# EAGLE board rapidshark_mark_6 (EAGLE 6.5.0)
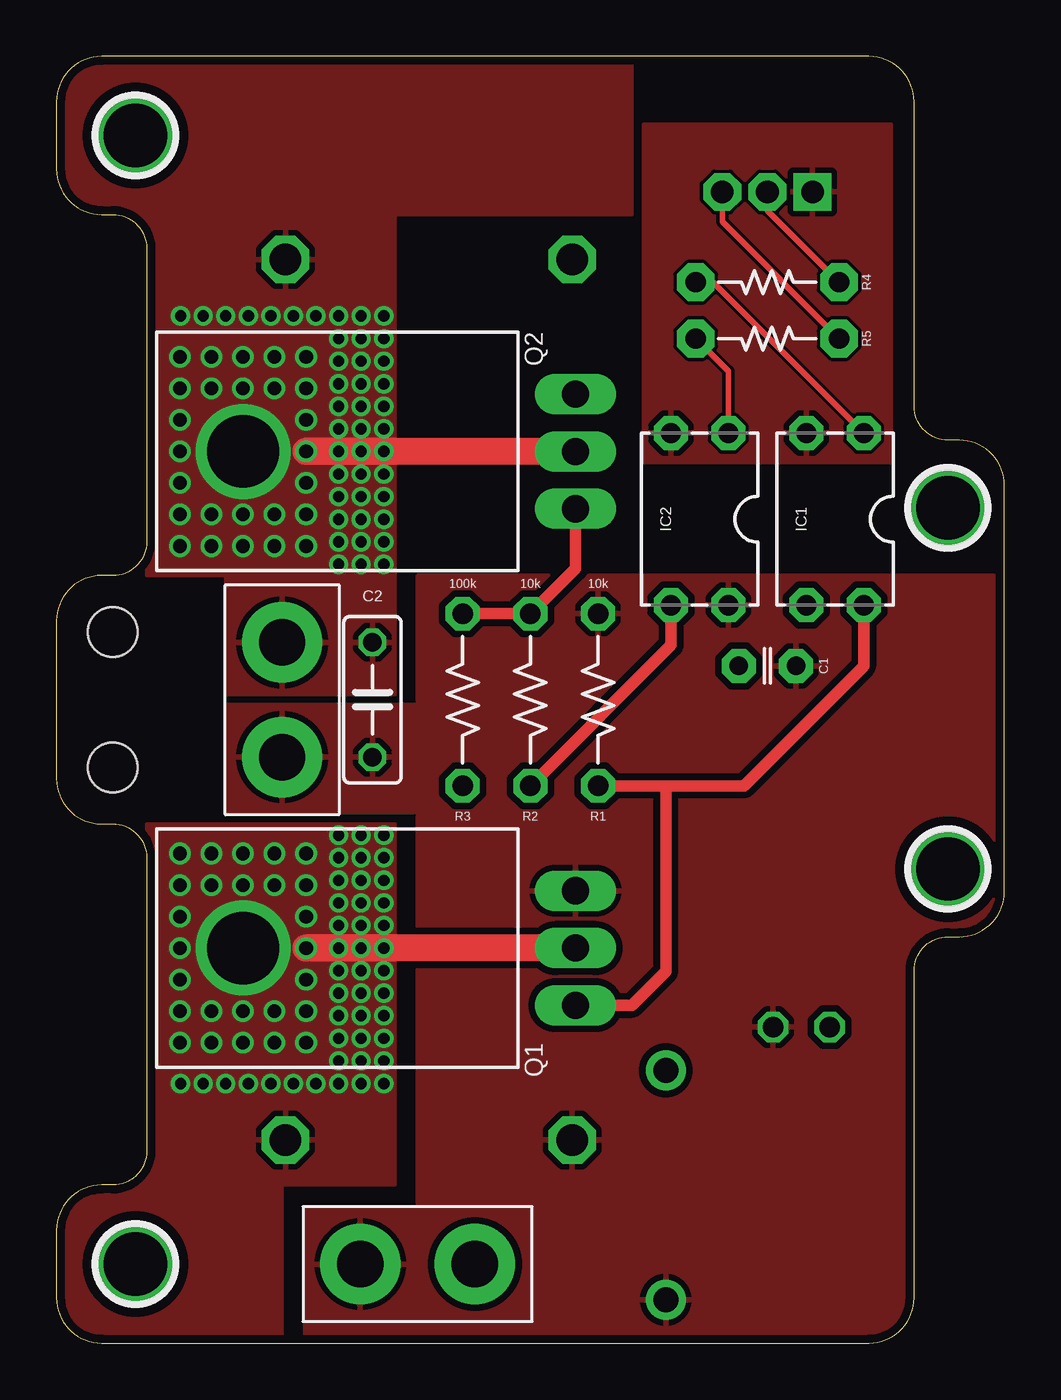
[diagram p0: board, top side]
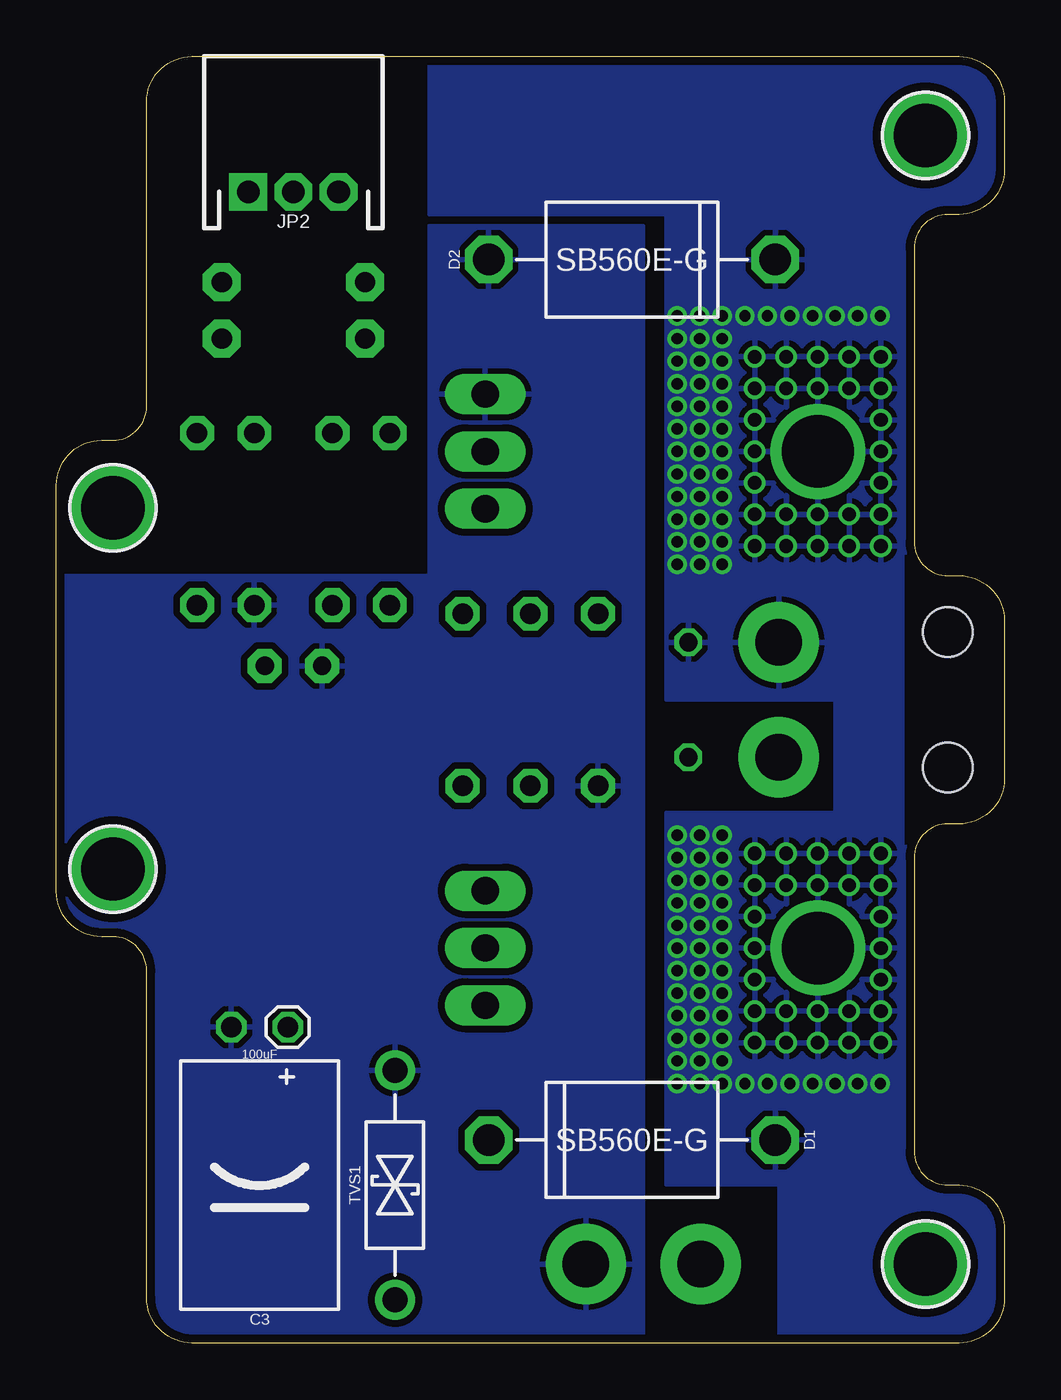
[diagram p1: board, bottom side, seen from below]

Size 42 x 57 mm. Coordinates in mm from the lower left corner, seen from the top.
Outline: 0,5 0,2 arc90 2,0 36,0 arc90 38,2 38,16.5 arc-90 39.5,18 40,18 arc90 42,20 42,38 arc90 40,40 39.5,40 arc-90 38,41.5 38,55 arc90 36,57 2,57 arc90 0,55 0,52 arc90 2,50 2.5,50 arc-90 4,48.5 4,35.5 arc-90 2.5,34 2,34 arc90 0,32 0,25 arc90 2,23 2.5,23 arc-90 4,21.5 4,8.5 arc-90 2.5,7 2,7 arc90 0,5
Copper layers (1*16): Top 0.0356mm / dielectric 1.5011mm / Bottom 0.0356mm
Design rules "LaenPCBOrder_2": minimum track width 6mil, minimum drill 13mil, track to track 6mil, track to pad 6mil, pad to pad 6mil, via to via 6mil, smd to smd 6mil, copper to edge 15mil, drill to drill 6mil, minimum pad ring 7mil, minimum via ring 7mil, stop-mask expansion 3mil, vias tented up to drill 20mil, thermal gap 10mil
Holes 2.2 mm at 2.5,31.5 2.5,25.5

## Footprints (pad centres in the part's own frame; a part is rotated, then mirrored left to right if it is on the bottom)
C025-024X044 = drill 0.813 pad 1.5 octagon: 1 -1.27,0; 2 1.27,0
C050-025X075 = drill 0.813 octagon: 1 -2.54,0; 2 2.54,0
E2.5-6-FLAT = drill 0.9 octagon: + -1.25,0; - 1.25,0
DIODE-12.70MM-FAT = drill 1.4 octagon: A -6.35,0; K 6.35,0
HOLE-#2 = drill 2.8 pad 3.81: P$1 0,0
DIL04 = drill 0.9 pad 1.5 octagon: 1 -1.27,-3.81; 2 1.27,-3.81; 3 1.27,3.81; 4 -1.27,3.81
1X02_XTRA_BIG = drill 2.057 pad 3.556: 1 -2.54,0; 2 2.54,0
JST-3-PH-RA-PTH = drill 1 pad 1.676 square: 1 -2,0 | drill 1 pad 1.676 octagon: 2 0,0; 3 2,0
TO-220-SIDE-THERM-ALT = drill 1.2 long: 1 -2.54,0; 2 0,0; 3 2.54,0 | drill 3.2: GND@1 0,14.732 | drill 0.6: GND@2 -4.191,13.335; GND@3 2.794,11.938; GND@4 -4.191,11.938; GND@5 -1.397,11.938; GND@6 1.397,11.938; GND@7 -2.794,11.938; GND@8 0,11.938; GND@9 -2.794,13.335; GND@10 -4.191,14.732; GND@11 -2.794,14.732; GND@12 -4.191,16.129; GND@13 -2.794,16.129; GND@14 4.191,11.938; GND@15 2.794,13.335; GND@16 4.191,13.335; GND@17 2.794,14.732; GND@18 4.191,14.732; GND@19 2.794,16.129; GND@20 4.191,16.129; GND@21 -4.191,17.526; GND@22 -2.794,17.526; GND@23 2.794,17.526; GND@24 4.191,17.526; GND@25 -1.397,17.526; GND@26 1.397,17.526; GND@27 0,17.526
RESISTOR-AXIAL-PTH-7.62MM = drill 0.9 pad 1.5 octagon: P$1 -3.81,0; P$2 3.81,0
RESISTOR-AXIAL-PTH-6.35MM = drill 0.9 pad 1.676 octagon: P$1 -3.175,0; P$2 3.175,0
DO-41-TVS-BI-10.16MM = drill 1.1 pad 1.778: P$1 -5.08,0; P$2 5.08,0

## Placement (x,y rotation side)
C1  1uF  [C025-024X044]  31.5,30 180 top
C2  2.2uF  [C050-025X075]  14,28.5 90 top
C3  100uF  [E2.5-6-FLAT]  33,14 180 bottom
D1  SB560E-G  [DIODE-12.70MM-FAT]  16.5,9 180 bottom
D2  SB560E-G  [DIODE-12.70MM-FAT]  16.5,48 0 bottom
H1  HOLE#2  [HOLE-#2]  3.5,3.5 0 top
H2  HOLE#2  [HOLE-#2]  3.5,53.5 0 top
H3  HOLE#2  [HOLE-#2]  39.5,21 0 top
H4  HOLE#2  [HOLE-#2]  39.5,37 0 top
IC1  OPTO_ISO  [DIL04]  34.5,36.5 180 top
IC2  OPTO_ISO  [DIL04]  28.5,36.5 180 top
JP1  M02PTH4  [1X02_XTRA_BIG]  16,3.5 180 top
JP2  M03JST-PTH  [JST-3-PH-RA-PTH]  31.5,51 0 bottom
M1  MOTORXTRA-BIG  [1X02_XTRA_BIG]  10,28.5 90 top
Q1  FQP27P06  [TO-220-SIDE-THERM-ALT]  23,17.5 90 top
Q2  FQP30N06L  [TO-220-SIDE-THERM-ALT]  23,39.5 90 top
R1  10k  [RESISTOR-AXIAL-PTH-7.62MM]  24,28.5 90 top
R2  10k  [RESISTOR-AXIAL-PTH-7.62MM]  21,28.5 90 top
R3  100k  [RESISTOR-AXIAL-PTH-7.62MM]  18,28.5 90 top
R4  220R  [RESISTOR-AXIAL-PTH-6.35MM]  31.5,47 180 top
R5  220R  [RESISTOR-AXIAL-PTH-6.35MM]  31.5,44.5 180 top
TVS1  12V  [DO-41-TVS-BI-10.16MM]  27,7 90 bottom

## Library data of the parts
C1-C3 D1 D2 H1-H4 IC1 IC2 JP1 M1 Q1 Q2 R1-R5 TVS1 = A_butts
JP2 = A_butts; SKU: PRT-09915

## Nets
CTRL_HIGH: JP2.2 R4.P$1
CTRL_LOW: JP2.3 R5.P$1
GND: IC1.2 IC2.2 JP2.1
M-: C2.2 D1.A D2.K M1.2 Q1.2 Q1.GND@1 Q1.GND@2 Q1.GND@3 Q1.GND@4 Q1.GND@5 Q1.GND@6 Q1.GND@7 Q1.GND@8 Q1.GND@9 Q1.GND@10 Q1.GND@11 Q1.GND@12 Q1.GND@13 Q1.GND@14 Q1.GND@15 Q1.GND@16 Q1.GND@17 Q1.GND@18 Q1.GND@19 Q1.GND@20 Q1.GND@21 Q1.GND@22 Q1.GND@23 Q1.GND@24 Q1.GND@25 Q1.GND@26 Q1.GND@27 Q2.2 Q2.GND@1 Q2.GND@2 Q2.GND@3 Q2.GND@4 Q2.GND@5 Q2.GND@6 Q2.GND@7 Q2.GND@8 Q2.GND@9 Q2.GND@10 Q2.GND@11 Q2.GND@12 Q2.GND@13 Q2.GND@14 Q2.GND@15 Q2.GND@16 Q2.GND@17 Q2.GND@18 Q2.GND@19 Q2.GND@20 Q2.GND@21 Q2.GND@22 Q2.GND@23 Q2.GND@24 Q2.GND@25 Q2.GND@26 Q2.GND@27
N$2: IC1.4 Q1.1 R1.P$1
N$3: Q2.1 R2.P$2 R3.P$2
N$4: IC1.1 R4.P$2
N$6: IC2.1 R5.P$2
N$7: IC2.3 R2.P$1
V+: C1.1 C2.1 C3.+ D1.K IC2.4 JP1.2 M1.1 Q1.3 R1.P$2 TVS1.P$1
V-: C1.2 C3.- D2.A IC1.3 JP1.1 Q2.3 R3.P$1 TVS1.P$2

## Tracks (layer width: path | path; a pad name or v marks a point on that pad's centre or on a via)
CTRL_HIGH
  Top 0.25: JP2.2 31.5,50.17 R4.P$1
CTRL_LOW
  Top 0.25: JP2.3 29.5,49.67 R5.P$1
GND
  pour Top: 26,54 26,39 37,39 37,54
M-  (via drill 0.5)
  Top 1.2: Q2.2 Q2.GND@8 | Q1.2 Q1.GND@8
  other vias: 13.5,43.5 13.5,42.5 13.5,41.5 13.5,40.5 13.5,39.5 13.5,44.5 13.5,38.5 14.5,43.5 14.5,42.5 14.5,41.5 14.5,40.5 14.5,39.5 14.5,44.5 14.5,38.5 12.5,36.5 12.5,35.5 12.5,34.5 12.5,37.5 13.5,36.5 13.5,35.5 13.5,34.5 13.5,37.5 14.5,36.5 14.5,35.5 14.5,34.5 14.5,37.5 13.5,12.5 14.5,12.5 12.5,22.5 12.5,12.5 13.5,13.5 14.5,13.5 12.5,13.5 13.5,22.5 13.5,14.5 14.5,14.5 12.5,14.5 14.5,22.5 13.5,21.5 14.5,21.5 14.5,45.5 14.5,11.5 12.5,21.5 13.5,20.5 14.5,20.5 13.5,45.5 13.5,11.5 12.5,20.5 13.5,19.5 14.5,19.5 12.5,45.5 12.5,11.5 12.5,19.5 13.5,18.5 14.5,18.5 11.5,45.5 11.5,11.5 12.5,18.5 13.5,15.5 14.5,15.5 7.5,45.5 8.5,45.5 8.5,11.5 12.5,15.5 13.5,16.5 14.5,16.5 9.5,45.5 9.5,11.5 12.5,16.5 7.5,11.5 13.5,17.5 14.5,17.5 10.5,45.5 10.5,11.5 12.5,17.5 12.5,43.5 12.5,42.5 12.5,41.5 12.5,40.5 12.5,39.5 12.5,44.5 12.5,38.5 5.5,45.5 6.5,11.5 6.5,45.5 5.5,11.5
  pour Top (isolate 0.3, rank 6): 4,34 4,48.5 arc90 2.5,50 2,50 arc-90 0,52 0,55 arc-90 2,57 25.5,57 25.5,50 15,50 15,28.7 7.5,28.7 7.5,34
  pour Top (isolate 0.3, rank 6): 4,23 15,23 15,7 10,7 10,0 2,0 arc-90 0,2 0,5 arc-90 2,7 2.5,7 arc90 4,8.5
  pour Top (no thermals): 4.5,44.5 4.5,34.5 12,34.5 12,44.5
  pour Top (no thermals): 4.5,22.5 12,22.5 12,12.5 4.5,12.5
  pour Bottom (isolate 0.3): 25.5,57 2,57 arc90 0,55 0,52 arc90 2,50 2.5,50 arc-90 4,48.5 4,35 4.5,35 4.5,22 4,22 4,8.5 arc-90 2.5,7 2,7 arc90 0,5 0,2 arc90 2,0 10,0 10,7 15,7 15,23.5 7.5,23.5 7.5,28.5 15,28.5 15,50 25.5,50
N$2
  Top 0.5: IC1.4 35.77,30 30.46,24.69 27,24.69 | 27,24.69 R1.P$1 | Q1.1 25.5,14.96 27,16.46 27,24.69
N$3
  Top 0.5: R3.P$2 R2.P$2 23,34.31 Q2.1
N$4
  Top 0.25: R4.P$2 29.08,47 IC1.1
N$6
  Top 0.25: R5.P$2 29.77,43.05 IC2.1
N$7
  Top 0.5: IC2.3 27.23,30.92 R2.P$1
V+
  pour Top (isolate 0.3): 16,34 16,28.3 7.5,28.3 7.5,23.5 16,23.5 16,6 11,6 11,0 36,0 arc90 38,2 38,16.5 arc-90 39.5,18 40,18 arc90 42,20 42,34
V-
  pour Bottom (isolate 0.3): 16,49.5 16,0 36,0 arc90 38,2 38,16.5 arc-90 39.5,18 40,18 arc90 42,20 42,34 25.5,34 25.5,49.5